# Altium PCB 辉光钟.PcbDoc
Units mm, origin at the board's own origin, x right, y up, seen from the top; angles counter-clockwise.
Board outline 141.86 x 70.74 mm, 2 copper layers (Top Layer, Bottom Layer); 55 components, 93 nets, 304 pads, 83 vias.
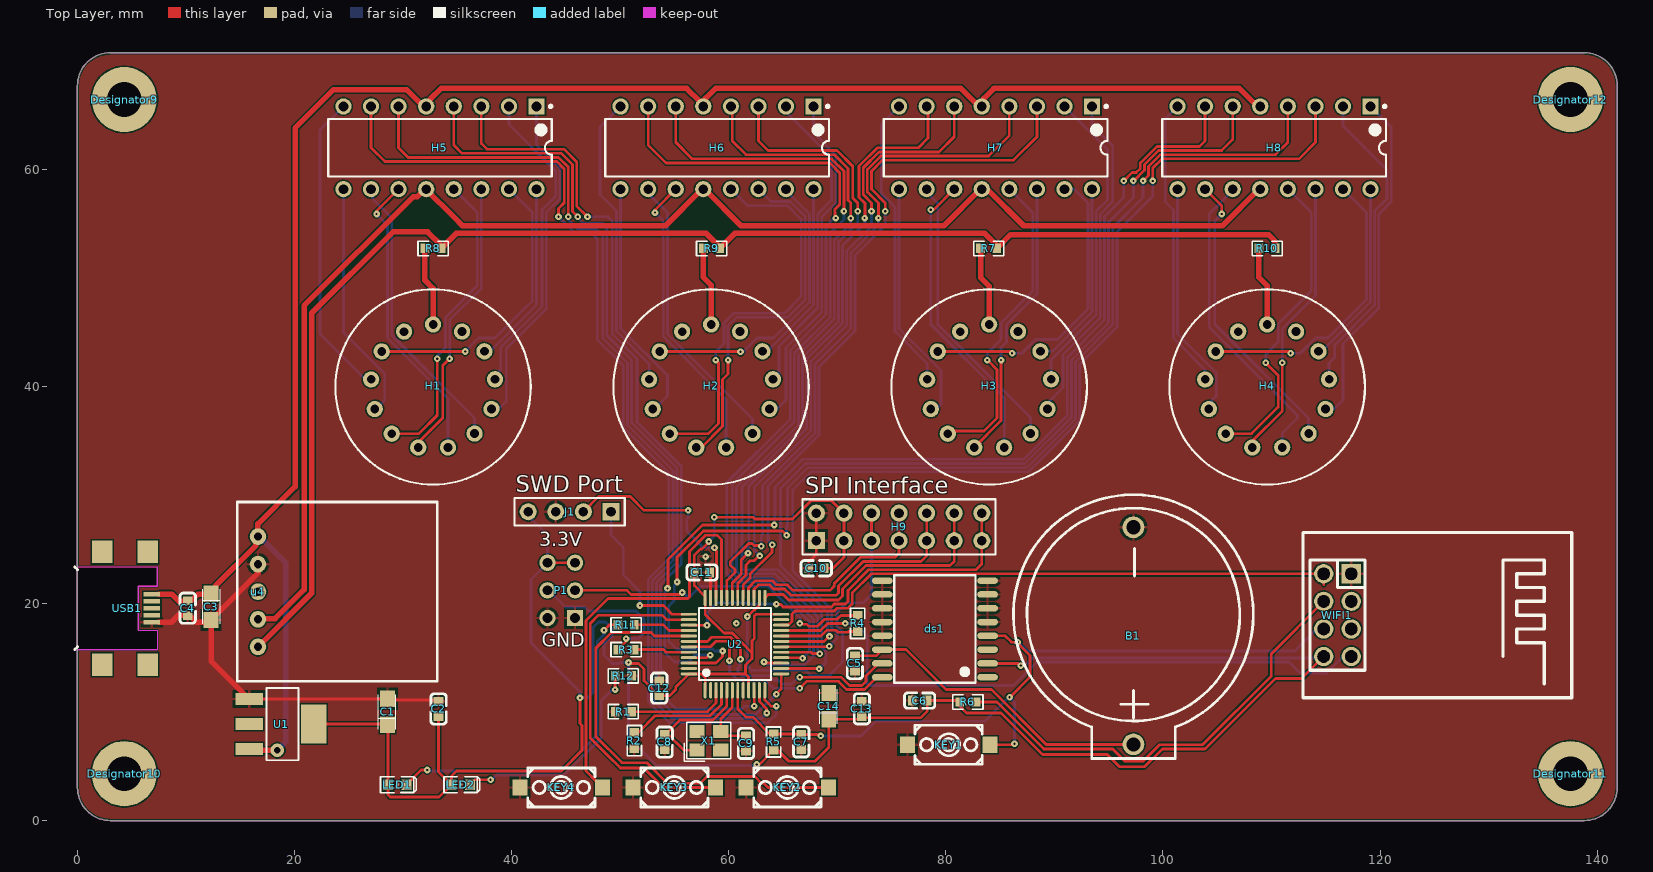
[diagram p0: Top Layer view]
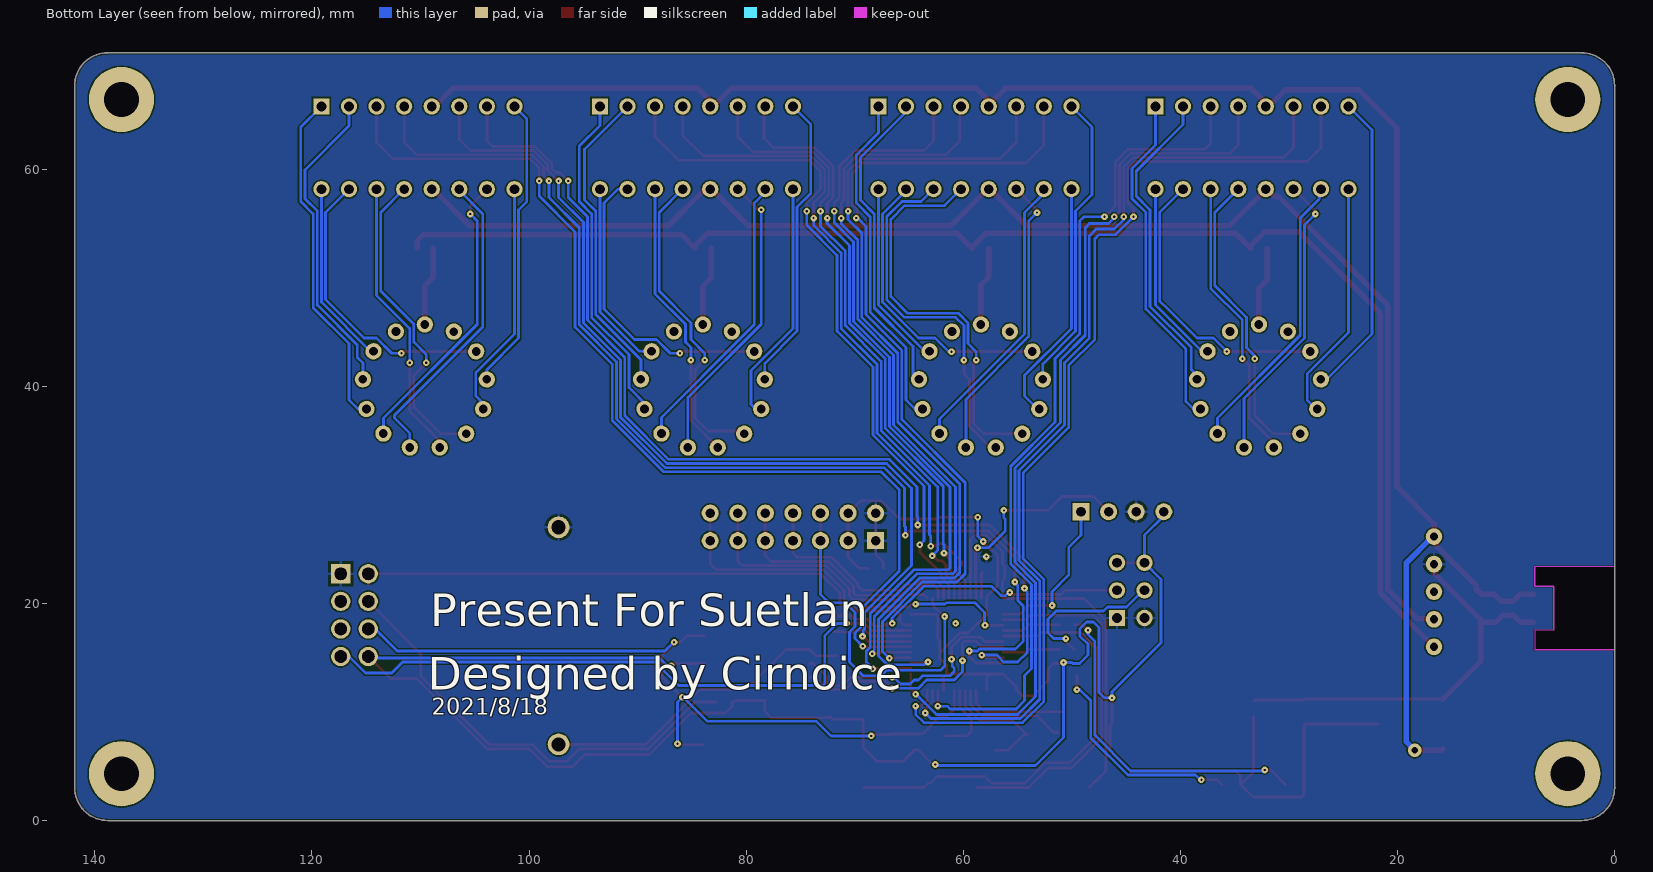
[diagram p1: Bottom Layer view, seen from below]

## Layer stack, top to bottom
Top Solder: solder mask 0.0102, Solder Resist, Dk 3.5
Top Layer: signal copper 0.0356
Dielectric 1: dielectric 0.32, FR-4, Dk 4.8
Bottom Layer: signal copper 0.0356
Bottom Solder: solder mask 0.0102, Solder Resist, Dk 3.5

## Board outline
3.049,0 cw(c3.048,3.048) 0,3.048 0,67.691 cw(c3.048,67.691) 3.048,70.74 3.048,70.739 138.811,70.739 cw(c138.811,67.691) 141.859,67.691 141.86,67.691 141.86,3.049 cw(c138.811,3.048) 138.812,0

## Design rules (kind name [scope] priority, off if disabled: settings)
Clearance [All] p1: gap=0.127 ignorepadtopadclearanceinfootprint=TRUE
PolygonConnect [All] p1: connectstyle=Relief reliefconductorwidth=0.254 reliefentries=4 polygonreliefangle="90 Angle" airgapwidth=0.254
RoutingVias [All] p1: holewidth=0.711 width=1.27 viastyle="Through Hole" minholewidth=0.711 minwidth=1.27 maxholewidth=0.711 maxwidth=1.27
SolderMaskExpansion [IsVia] p1: expansion=0.102 istentingtop=TRUE
Width [InNet('No Net')] p1: maxlimit=0.508 minlimit=0.508 preferedwidth=0.508 minimp=50.000000 maximp=50.000000 favimp=50.000000
30 further rules are at their usual default settings.

## Classes and differential pairs
component class 2: H1 H2 H3 H4 H5 H6 H7 H8 R7 R8 R9 R10
component class 1: B1 C1 C2 C3 C4 C5 C6 C7 C8 C9 C10 C11 C12 C13 C14 ds1 H9 J1 KEY1 KEY2 KEY3 KEY4 LED1 LED2 P1 R1 R2 R3 R4 R5 R6 R11 R12 U1 U2 u4 USB1 WIFI1 X1

## Components (designator, comment, footprint, x,y, rotation, side; value= is the part's Value field where it differs from the comment)
B1 "CR2032-BS-2-1" BAT-TH_BS-2-1 97.282,17.018 r0 top
C1 "1u" CASE-A_3216 28.575,10.033 r90 top
C2 "0603C" C0603 33.274,10.287 r90 top
C3 "1u" CASE-A_3216 12.319,19.685 r270 top
C4 "0603C" C0603 10.16,19.558 r270 top
C5 "0.1u" C0603 71.628,14.478 r90 top
C6 "0.1u" C0603 77.597,11.049 r0 top
C7 "0603C" C0603 66.675,7.239 r270 top
C8 "15pF" C0603 54.102,7.239 r90 top
C9 "15pF" C0603 61.595,7.112 r90 top
C10 "100nF" C0603 68.072,23.241 r0 top
C11 "100nF" C0603 57.531,22.86 r180 top
C12 "100nF" C0603 53.594,12.192 r270 top
C13 "100nF" C0603 72.263,10.287 r270 top
C14 "1u" CASE-A_3216 69.215,10.541 r90 top
Designator9 "Comment" M3-6W*6H-3.2D 4.318,66.421 r0 top
Designator10 "Comment" M3-6W*6H-3.2D 4.318,4.318 r0 top
Designator11 "Comment" M3-6W*6H-3.2D 137.541,4.318 r0 top
Designator12 "Comment" M3-6W*6H-3.2D 137.541,66.421 r0 top
ds1 "DS3231" DS3231 78.994,17.653 r180 top
H1 "IN-14" IN-14 32.766,40.032 r0 top
H2 "IN-14" IN-14 58.378,40.032 r0 top
H3 "IN-14" IN-14 83.99,40.032 r0 top
H4 "IN-14" IN-14 109.601,40.032 r0 top
H5 "K155ID1" DIP-16 33.401,61.976 r270 top
H6 "K155ID1" DIP-16 58.928,61.976 r270 top
H7 "K155ID1" DIP-16 84.582,61.976 r270 top
H8 "K155ID1" DIP-16 110.236,61.976 r270 top
H9 "HDR-F-2.54_2x7" HDR-F-2.54_2X7 75.692,27.051 r0 top
J1 "HDR-M-2.54_1x4" HDR-M-2.54_1X4 45.339,28.448 r180 top
KEY1 "K2-3.6×6.1_SMD" KEY-SMD_2P-L6.2-W3.6-LS8.0 80.264,6.985 r180 top
KEY2 "K2-3.6×6.1_SMD" KEY-SMD_2P-L6.2-W3.6-LS8.0 65.405,3.048 r180 top
KEY3 "K2-3.6×6.1_SMD" KEY-SMD_2P-L6.2-W3.6-LS8.0 54.991,3.048 r180 top
KEY4 "K2-3.6×6.1_SMD" KEY-SMD_2P-L6.2-W3.6-LS8.0 44.577,3.048 r180 top
LED1 "LED-0603_R" LED0603_RED 29.464,3.302 r0 top
LED2 "LED-0603_R" LED0603_RED 35.306,3.302 r0 top
P1 "ISCP" HDR2X3 45.847,18.669 r90 top
R1 "10KR" R0603 50.292,10.033 r0 top
R2 "10KR" R0603 51.308,7.366 r90 top
R3 "10KR" R0603 50.546,15.748 r180 top
R4 "10KR" R0603 71.882,18.161 r270 top
R5 "10K" R0603 64.135,7.239 r270 top
R6 "10KR" R0603 82.033,10.922 r180 top
R7 "10KR" R0603 83.947,52.705 r0 top
R8 "10KR" R0603 32.766,52.705 r0 top
R9 "10KR" R0603 58.42,52.705 r0 top
R10 "10KR" R0603 109.601,52.705 r0 top
R11 "0603R" R0603 50.546,18.034 r180 top
R12 "0603R" R0603 50.292,13.335 r180 top
U1 "AMS1117-3.3" SOT-223-3_L6.5-W3.4-P2.30-LS7.0-BR 18.796,8.89 r180 top
U2 "STM32F103C8T6" LQFP-48_L7.0-W7.0-P0.50-LS9.0-BL 60.579,16.256 r0 top locked
u4 "5-170" 5-170V 16.637,21.082 r270 top
USB1 "USB-Micro_2" MICRO-USB-SMD_5P_C40957 4.572,19.558 r270 top
WIFI1 "ESP-01" ESP-01 117.348,22.733 r270 top
X1 "20MHz" CRYSTAL-SMD_4P-L3.2-W2.5-BL 58.166,7.366 r0 top

## Footprints (in the part's own frame and the unit in brackets; to place one, negate y for a bottom-side part, rotate by r counter-clockwise, add the part's x,y. Pads: shape width x height; smd on the part's side, far side on the other; paste and mask are expansions set on the pad)
5-170V [mil]
  round 60 hole 30: 0(0,0) 1(-200,0) 2(-100,0) 3(100,0) 4(200,0)
  silkscreen extent -325,-75 325,650, body extent -325,-75 325,650, height 49
BAT-TH_BS-2-1 [mm]
  round 2 hole 1.3: 1(0,-10) 2(0,10)
  silkscreen extent -11.05,-11.3 11.04,13
C0603 [mm]
  rect 0.8x0.9 smd: 1(-0.7,0) 2(0.7,0)
  silkscreen extent -1.41,-0.71 1.39,0.72
CASE-A_3216 [mm]
  rect 1.5x1.359 smd: 1(-1.2,0) 2(1.2,0)
  silkscreen extent -1.64,-0.76 1.56,0.84
CRYSTAL-SMD_4P-L3.2-W2.5-BL [mm]
  rect 1.4x1.2 smd: 1(-1.1,-0.85) 2(1.1,-0.85) 3(1.1,0.85) 4(-1.1,0.85)
  silkscreen extent -2.26,-1.91 2.03,1.68
DIP-16 [mm] "DIP; 16 Leads; Row Spacing 7.62 mm; Pitch 2.54 mm"
  rect 1.5x1.5 hole 0.9: 1(-3.81,8.89)
  round 1.5 hole 0.9: 2(-3.81,6.35) 3(-3.81,3.81) 4(-3.81,1.27) 5(-3.81,-1.27) 6(-3.81,-3.81) 7(-3.81,-6.35) 8(-3.81,-8.89) 9(3.81,-8.89) 10(3.81,-6.35) 11(3.81,-3.81) 12(3.81,-1.27) 13(3.81,1.27) 14(3.81,3.81) 15(3.81,6.35) 16(3.81,8.89)
  silkscreen extent -3.93,-10.3 2.65,10.32, body extent -3.6,-10.28 3.6,10.28, height 5.08
DS3231 [mm]
  oval 1.9x0.6 smd: 1(-4.85,4.445) 2(-4.85,3.175) 3(-4.85,1.905) 4(-4.85,0.635) 5(-4.85,-0.635) 6(-4.85,-1.905) 7(-4.85,-3.175) 8(-4.85,-4.445) 9(4.85,-4.445) 10(4.85,-3.175) 11(4.85,-1.905) 12(4.85,-0.635) 13(4.85,0.635) 14(4.85,1.905) 15(4.85,3.175) 16(4.85,4.445)
  silkscreen extent -3.75,-4.95 3.75,4.95, body extent -5.15,-5.1 5.15,5.1, height 3.5
ESP-01 [mil]
  rect 70x70 hole 45 slot 45.2 at 0 deg: 1(0,0)
  round 70 hole 45 slot 45.2 at 0 deg: 2(100,0) 3(200,0) 4(300,0) 5(300,-100) 6(200,-100) 7(100,-100) 8(0,-100)
  silkscreen extent -150,-175 450,800
HDR2X3 [mm] "Connector; Header; 3x2 Position"
  rect 1.5x1.5 hole 0.9: 1(0,0)
  round 1.5 hole 0.9: 2(0,2.54) 3(2.54,0) 4(2.54,2.54) 5(5.08,0) 6(5.08,2.54)
HDR-F-2.54_2X7 [mil]
  rect 62x62 hole 35: 1(-300,-50)
  round 62 hole 35: 2(-300,50) 3(-200,-50) 4(-200,50) 5(-100,-50) 6(-100,50) 7(0,-50) 8(0,50) 9(100,-50) 10(100,50) 11(200,-50) 12(200,50) 13(300,-50) 14(300,50)
  silkscreen extent -350,-100 350,100
HDR-M-2.54_1X4 [mil]
  rect 62x62 hole 35: 1(-150,0)
  round 62 hole 35: 2(-50,0) 3(50,0) 4(150,0)
  silkscreen extent -200,-50 200,50
IN-14 [mm]
  round 1.5 hole 0.8: 0(4.728,3.19) 1(-4.732,3.182) 2(-5.708,0.608) 3(-5.375,-2.125) 4(-3.809,-4.389) 5(-1.371,-5.667) 6(1.382,-5.665) 7(3.818,-4.383) 8(5.379,-2.115) 9(5.708,0.618) 11(0.001,5.667) L0(2.665,5.013) R0(-2.672,5.008)
  silkscreen extent -9,-9.08 9,8.92
KEY-SMD_2P-L6.2-W3.6-LS8.0 [mm]
  rect 1.4x1.5 smd: 1(-3.8,0) 2(3.8,0)
  silkscreen extent -3.1,-1.8 3.1,1.8
LED0603_RED [mm]
  rect 0.9x1 smd: 1(-0.85,0) 2(0.85,0)
  silkscreen extent -1.54,-0.73 1.75,0.73
LQFP-48_L7.0-W7.0-P0.50-LS9.0-BL [mm]
  oval 0.27x1.5 smd: 1(-2.75,-4.25) 2(-2.25,-4.25) 3(-1.75,-4.25) 4(-1.25,-4.25) 5(-0.75,-4.25) 6(-0.25,-4.25) 7(0.25,-4.25) 8(0.75,-4.25) 9(1.25,-4.25) 10(1.75,-4.25) 11(2.25,-4.25) 12(2.75,-4.25) 25(2.75,4.25) 26(2.25,4.25) 27(1.75,4.25) 28(1.25,4.25) 29(0.75,4.25) 30(0.25,4.25) 31(-0.25,4.25) 32(-0.75,4.25) 33(-1.25,4.25) 34(-1.75,4.25) 35(-2.25,4.25) 36(-2.75,4.25)
  oval 1.5x0.27 smd: 13(4.25,-2.75) 14(4.25,-2.25) 15(4.25,-1.75) 16(4.25,-1.25) 17(4.25,-0.75) 18(4.25,-0.25) 19(4.25,0.25) 20(4.25,0.75) 21(4.25,1.25) 22(4.25,1.75) 23(4.25,2.25) 24(4.25,2.75) 37(-4.25,2.75) 38(-4.25,2.25) 39(-4.25,1.75) 40(-4.25,1.25) 41(-4.25,0.75) 42(-4.25,0.25) 43(-4.25,-0.25) 44(-4.25,-0.75) 45(-4.25,-1.25) 46(-4.25,-1.75) 47(-4.25,-2.25) 48(-4.25,-2.75)
  silkscreen extent -3.33,-3.31 3.3,3.34
M3-6W*6H-3.2D [mm]
  round 6 hole 3.2: 1(0,0)
MICRO-USB-SMD_5P_C40957 [mm]
  rect 0.4x1.524 smd: 1(-1.3,2.288) 2(-0.65,2.288) 3(0,2.288) 4(0.65,2.288) 5(1.3,2.288)
  rect 2.1x1.9 smd: 6(5.2,1.913) 7(5.2,-2.288) 8(-5.2,-2.288) 9(-5.2,1.913)
  Keep-Out Layer board cut-out: -3.81,-4.572 -3.81,2.794 -2.032,2.794 -2.032,1.016 2.032,1.016 2.032,2.794 3.81,2.794 3.81,-4.572 -3.81,-4.572
  Keep-Out Layer lines w0.1: 3.81,-4.57 3.81,2.796 2.032,2.794 2.032,1.016 -2.032,1.016 -2.032,2.794 -3.81,2.796 -3.81,-4.57 3.81,-4.57
  silkscreen extent -3.81,-4.82 3.81,-4.57
R0603 [mm]
  rect 0.806x0.864 smd: 1(-0.753,0) 2(0.753,0)
  silkscreen extent -1.39,-0.66 1.39,0.66
SOT-223-3_L6.5-W3.4-P2.30-LS7.0-BR [mm]
  rect 2.5x1.1 smd: 1(2.97,-2.3) 2(2.97,0) 3(2.97,2.3)
  rect 2.34x3.6 smd: 4(-2.97,0)
  silkscreen extent -1.57,-3.33 1.37,3.33

## Part data
B1: BOM_JLCPCB Part Class="Extended Part", BOM_Manufacturer=Q&J, BOM_Manufacturer Part=BS-2-1, BOM_Supplier=LCSC, BOM_Supplier Part=C70376, spicePre=B, spiceSymbolName=CR2032-BS-2-1
C5 C6 C8 C9 C10 C11 C12 C13: library part 0603C, Contributor=LCEDA_Lib, nameAlias=Value(F), spicePre=C, spiceSymbolName=C_0603_US
KEY1 KEY2 KEY3 KEY4: BOM_Manufacturer Part=K2-1107ST-A4SW-06, BOM_Supplier=LCSC, BOM_Supplier Part=C118141, Contributor=LCEDA_Lib, spicePre=K, spiceSymbolName=K2-3.6×6.1_SMD, 制造商=韩国韩荣
LED1 LED2: BOM_Manufacturer=EVERLIGHT(台湾亿光), BOM_Manufacturer Part=19-217/R6C-AL1M2VY/3T, BOM_Supplier=LCSC, BOM_Supplier Part=C72044, Contributor=LCEDA_01, spicePre=L, spiceSymbolName=LED-0603_R
P1: library part "Header 3X2", "Header, 3-Pin, Dual row", LatestRevisionDate=17-Jul-2002, LatestRevisionNote="Re-released for DXP Platform.", Publisher="Altium Limited"
R1 R2 R3 R4 R5 R6 R7 R8 R9 R10: library part 0603R, Contributor=LCEDA_Lib, nameAlias=Value(Ω), spicePre=R, spiceSymbolName=R_0603_EU
U1: BOM_JLCPCB Part Class="Basic Part", BOM_Manufacturer=AMS, BOM_Manufacturer Part=AMS1117-3.3, BOM_Supplier=LCSC, BOM_Supplier Part=C6186, sourceId=dwIGgezVh, spicePre=U, spiceSymbolName=AMS1117-3.3, timeStamp=1476261164
U2: BOM_JLCPCB Part Class="Basic Part", BOM_Manufacturer=STMicroelectronics, BOM_Manufacturer Part=STM32F103C8T6, BOM_Supplier=LCSC, BOM_Supplier Part=C8734, spicePre=U, spiceSymbolName=STM32F103C8T6, timeStamp=1455028086
USB1: BOM_Manufacturer=ValuePro, BOM_Supplier=LCSC, BOM_Supplier Part=C40957, Contributor=LCEDA_Lib, spicePre=U, spiceSymbolName=USB-Micro_2
X1: BOM_JLCPCB Part Class="Extended Part", BOM_Manufacturer="Zhejiang Abel Elec", BOM_Manufacturer Part=SMD-3225_4P20MHZ20PF10PPM, BOM_Supplier=LCSC, BOM_Supplier Part=C172730, Contributor=LCSC, nameAlias=Frequency, spicePre=X, spiceSymbolName=SMD-3225_4P20MHZ20PF10PPM
C1 C3 C14: Contributor=LCEDA_Lib, nameAlias=Value(F), spicePre=C, spiceSymbolName=C_Tan_SMD_A_US
C2 C4 C7: Contributor=LCEDA_Lib, nameAlias=Value(F), spicePre=C, spiceSymbolName=C_0603_US
H9: BOM_Supplier=LCSC, BOM_Supplier Part=C38844, Contributor=LCEDA_Lib, spicePre=H, spiceSymbolName=HDR-F-2.54_2x7
J1: BOM_Supplier=LCSC, BOM_Supplier Part=C124378, Contributor=LCEDA_Lib, spicePre=J, spiceSymbolName=HDR-M-2.54_1x4
R11 R12: Contributor=LCEDA_Lib, nameAlias=Value(Ω), spicePre=R, spiceSymbolName=R_0603_EU
WIFI1: Contributor=jishuhai, spicePre=w, spiceSymbolName=ESP-01

## Via types
v1: diameter 0.61, hole 0.203, Top Layer to Bottom Layer, tented both sides, 82 vias
v2: diameter 1.27, hole 0.635, Top Layer to Bottom Layer, tented both sides, 1 vias

## Nets (pads, with @x,y where several pads share a name; then routed paths per layer and width w, separated by ;. In a path a pad name is that pad's centre, name@x,y a point inside that pad or via, vN(x,y) a via of type N, cw(c..) or ccw(c..) an arc to the next point about the centre after c; other vN are vias at no path point)
1-7: H1.7 H5.10 | length 27
  Bottom Layer w0.254: H5.10@26.67,57.785 H5.10 27.216,58.002 27.216,57.24 28.956,55.499 28.956,44.704 36.585,37.076 H1.7
1-8: H1.8 H5.1 | length 31.8
  Bottom Layer w0.254: H1.8 38.806,37.917 39.497,38.608 39.497,43.434 43.18,47.117 43.18,56.007 44.45,57.277 44.45,60.071 42.291,62.23 H5.1
1-9: H1.9 H5.2 | length 29.2
  Bottom Layer w0.254: H1.9 38.474,41.014 38.989,41.529 38.989,43.561 42.799,47.371 42.799,56.261 44.069,57.531 44.069,59.817 39.751,64.135 H5.2
3.3V: C1.1 C2.1 C6.2 C10.2 C11.2 C12.2 C13.2 C14.1 ds1.2 H9.3 H9.4 J1.4 LED1.1 LED2.1 P1.5 P1.6 R5.2 R6.2 U1.4 U2.1 U2.9 U2.24 U2.36 U2.48 WIFI1.5 | length 261.2
  Top Layer w0.254: U1.4 28.518,8.89 28.614,8.794 LED1.1 28.614,2.374 28.829,2.159 33.313,2.159 LED2.1 ; C2.1 33.274,4.484 LED2.1 ; P1.6 P1.5 44.323,23.749 ; v1(46.304,11.303) 46.304,8.931 46.482,8.753 46.482,6.477 44.577,4.572 34.925,4.572 34.456,4.103 LED2.1 ; v1@50.8,14.478 51.689,14.478 52.197,13.97 52.197,12.889 C12.2 54.545,11.492 55.118,12.065 55.118,12.295 U2.48 57.252,13.506 57.487,13.506 ; U2.1 57.829,13.164 57.487,13.506 ; v1(58.166,25.705) 58.166,25.654 57.528,25.016 57.401,25.016 56.831,24.446 C11.2 56.831,21.655 57.829,20.657 U2.36 57.829,19.006 59.563,17.272 60.325,17.272 61.341,16.256 62.154,15.443 ; v1(58.674,27.94) 62.253,27.94 62.405,27.788 65.888,27.788 67.564,29.464 69.469,29.464 H9.4 H9.3 70.612,24.257 69.596,23.241 C10.2 ; U2.9 61.829,13.228 61.551,13.506 ; v1@62.611,5.08 62.729,5.08 R5.2 ; R5.2@64.142,6.524 64.469,6.524 65.532,5.461 67.945,5.461 69.215,6.731 C14.1 72.017,9.341 C13.2 ; U2.24 64.826,19.003 62.506,19.003 62.357,18.854 62.357,16.764 62.154,16.561 62.154,15.443 ; C13.2@72.14,9.464 77.663,9.464 78.297,10.098 C6.2 81.019,11.049 R6.2@81.318,10.75 ; R6.2 81.28,10.541 81.915,9.906 85.09,9.906 88.9,6.096 94.869,6.096 96.012,4.953 98.298,4.953 99.949,6.604 103.886,6.604 110.363,13.081 112.776,13.081 WIFI1.5 ; ds1.2 86.693,14.478 v1(86.894,14.277) ; 57.487,13.506 61.551,13.506 ; 61.551,13.506 61.551,14.315 62.154,14.917 62.154,15.443
  Bottom Layer w0.254: J1.4 41.529,28.067 43.307,26.289 P1.6 41.783,22.225 41.783,16.383 46.304,11.862 v1(46.304,11.303) 46.99,11.303 47.498,11.811 47.498,17.399 47.498,17.78 48.006,18.288 48.641,18.288 49.276,17.653 49.276,17.018 48.514,16.256 48.514,15.24 49.276,14.478 49.929,14.478 50.013,14.562 50.679,14.562 v1@50.763,14.478 ; v1(50.763,14.562) 50.763,7.658 53.34,5.08 v1@62.611,5.08 ; v1(58.166,25.705) 58.674,26.213 v1(58.674,27.94) ; v1(86.894,14.277) 87.302,14.277 88.011,14.986 114.681,14.986 WIFI1.5
  other v1: 62.574,5.164
+5V: C3.1 C4.1 H5.5 H6.5 H7.5 H8.5 U1.3 u4.1 USB1.1 | length 171.2
  Top Layer w0.508: USB1.1@7.495,20.858 8.694,20.858 9.359,20.193 10.428,20.193 11.093,20.858 C3.1@12.292,20.858 ; C3.1 12.745,21.311 12.745,21.635 16.443,25.333 16.443,25.968 u4.1 ; U1.3 15.939,6.477 v2(18.415,6.477) ; u4.1@16.617,26.183 16.617,27.322 20.066,30.771 20.066,63.791 23.604,67.329 30.335,67.329 31.877,65.786 H5.5 32.131,66.055 32.547,66.47 32.547,66.493 33.51,67.456 56.116,67.456 57.398,66.174 57.398,66.071 H6.5@57.386,66.059 ; H6.5 H6.5@57.386,66.059 ; H7.5@82.913,65.932 81.389,67.456 58.783,67.456 57.848,66.521 57.848,66.244 57.662,66.059 H6.5@57.386,66.059 ; H7.5 83.04,66.059 83.316,66.059 83.502,66.244 83.502,66.521 84.437,67.456 107.043,67.456 108.712,65.786 H8.5
  Bottom Layer w0.508: u4.1@16.54,26.065 16.861,26.065 19.177,23.749 19.177,7.332 19.177,7.239 v2(18.415,6.477)
+170V: R7.2 R8.2 R9.2 R10.2 u4.4 | length 129.4
  Top Layer w0.508: u4.4 21.59,20.955 21.59,46.736 29.083,54.229 32.258,54.229 33.519,52.968 R8.2 34.916,54.102 57.912,54.102 59.173,52.841 R9.2 60.57,54.102 83.566,54.102 84.7,52.968 R7.2 85.97,53.975 109.728,53.975 110.316,53.387 R10.2@110.316,52.712
BOOT0: P1.4 R3.2 | length 14.4
  Top Layer w0.254: R3.2 50.546,16.501 v1(50.546,16.764)
  Bottom Layer w0.254: P1.4 43.434,21.209 44.97,19.673 46.702,19.673 47.071,19.304 51.435,19.304 52.197,18.542 52.197,17.294 51.667,16.764 v1(50.546,16.764)
BOOT1: P1.3 R4.1 | length 28.9
  Top Layer w0.254: P1.3 50.623,21.209 51.004,20.828 55.442,20.828 55.62,21.006 v1(55.716,21.006) ; v1(66.548,18.161) 66.616,18.093 67.175,18.093 67.361,17.907 68.199,17.907 68.834,18.542 69.977,18.542 70.331,18.896 R4.1@71.724,18.896
  Bottom Layer w0.254: v1(55.716,21.006) 55.812,21.006 56.103,20.715 56.529,20.715 57.4,21.586 63.631,21.586 66.571,18.646 66.571,18.138 v1@66.582,18.127
CS1-1: H5.3 U2.10 | length 78.6
  Top Layer w0.254: H5.3 37.211,62.357 37.719,61.849 44.831,61.849 45.99,60.691 45.99,56.627 v1(46.99,55.626) ; v1(62.357,10.541) U2.10@62.357,11.979
  Bottom Layer w0.254: v1(46.99,55.626) 48.895,55.626 49.276,55.245 49.276,44.831 51.562,42.545 51.562,36.703 55.626,32.639 55.626,23.653 53.721,21.748 53.721,14.002 54.356,13.367 54.356,11.049 55.118,10.287 61.214,10.287 61.468,10.541 v1(62.357,10.541)
CS1-2: H5.6 U2.11 | length 88.8
  Top Layer w0.254: H5.6 29.591,61.976 30.48,61.087 44.323,61.087 45.228,60.183 v1@45.228,55.642 ; U2.11 62.829,10.958 63.5,10.287 v1(63.5,9.906)
  Bottom Layer w0.254: v1(45.212,55.626) 45.212,55.372 46.101,54.483 47.752,54.483 48.387,53.848 48.387,44.45 50.673,42.164 50.673,36.449 54.864,32.258 54.864,23.968 52.959,22.063 52.959,11.176 54.737,9.398 62.865,9.398 62.992,9.398 v1(63.5,9.906)
CS1-3: H5.7 U2.12 | length 93.5
  Top Layer w0.254: H5.7 27.051,61.976 28.321,60.706 44.165,60.706 44.847,60.025 44.847,56.912 44.323,56.388 v1(44.323,55.626) ; U2.12 63.329,11.093 63.881,10.541 v1(64.389,10.541)
  Bottom Layer w0.254: v1(44.323,55.626) 45.974,53.975 47.498,53.975 47.879,53.594 47.879,44.323 50.292,41.91 50.292,36.195 54.483,32.004 54.483,24.126 52.578,22.221 52.578,10.969 54.53,9.017 63.373,9.017 63.627,9.017 64.389,9.779 v1(64.389,10.541)
CS1-4: H5.4 U2.13 | length 84.6
  Top Layer w0.254: H5.4 34.671,62.23 35.433,61.468 44.577,61.468 45.609,60.437 45.609,56.119 v1(46.101,55.626) ; v1(64.389,11.633) 64.389,11.684 64.829,12.124 U2.13
  Bottom Layer w0.254: v1(46.101,55.626) 46.101,55.499 46.609,54.991 48.387,54.991 48.768,54.61 48.768,44.704 51.054,42.418 51.054,36.672 55.245,32.481 55.245,23.81 53.34,21.905 53.34,11.43 54.991,9.779 62.484,9.779 64.338,11.633 v1(64.389,11.633)
CS2-1: H6.3 U2.14 | length 72.6
  Top Layer w0.254: H6.3 62.738,62.611 63.627,61.722 69.977,61.722 71.425,60.274 71.425,57.353 71.882,56.896 v1(71.882,56.134) ; U2.14 66.457,14.006 68.29,14.006 v1(68.326,13.97)
  Bottom Layer w0.254: v1(68.326,13.97) 68.936,14.58 68.936,15.599 68.58,15.954 68.58,19.05 64.516,23.114 61.363,23.114 61.214,23.263 61.214,30.703 66.802,36.291 66.802,42.672 70.104,45.974 70.104,53.309 71.882,55.087 v1(71.882,56.134)
CS2-2: H6.6 U2.15 | length 80.4
  Top Layer w0.254: H6.6 55.118,62.484 56.642,60.96 69.469,60.96 70.612,59.817 v1(70.612,56.134) ; v1(63.246,14.605) 63.373,14.605 63.472,14.506 U2.15
  Bottom Layer w0.254: v1(63.246,14.605) 63.319,14.605 63.573,14.351 66.996,14.351 67.818,15.173 67.818,18.542 64.008,22.352 60.802,22.352 60.325,22.829 60.325,30.988 66.04,36.703 66.04,43.053 69.342,46.355 69.342,54.102 70.612,55.372 v1(70.612,56.134)
CS2-3: H6.7 U2.16 | length 78.7
  Top Layer w0.254: H6.7 52.578,62.23 54.229,60.579 69.311,60.579 70.231,59.659 70.231,56.769 69.774,56.312 69.774,56.058 69.782,56.05 69.782,55.567 v1(69.85,55.499) ; U2.16 64.832,15.003 66.746,15.003 v1(66.802,14.947)
  Bottom Layer w0.254: v1(66.802,14.947) 67.437,15.582 67.437,16.576 67.437,18.319 63.785,21.971 60.579,21.971 59.817,22.733 59.817,31.115 65.659,36.957 65.659,43.307 68.961,46.609 68.961,54.737 69.723,55.499 v1(69.85,55.499)
CS2-4: H6.4 U2.17 | length 72.5
  Top Layer w0.254: H6.4@60.325,65.532 60.325,62.611 61.595,61.341 69.723,61.341 70.993,60.071 70.993,57.15 71.247,56.896 v1(71.247,55.48) ; U2.17 67.564,15.506 67.691,15.379 68.365,15.379 v1(68.377,15.367)
  Bottom Layer w0.254: v1(68.377,15.367) 68.377,15.463 68.199,15.641 68.199,18.796 64.262,22.733 60.96,22.733 60.706,22.987 60.706,30.734 66.421,36.449 66.421,42.895 69.723,46.197 69.723,53.467 71.247,54.991 v1(71.247,55.48)
CS3-1: H7.3 U2.29 | length 64.9
  Top Layer w0.254: U2.29 61.329,21.637 61.329,21.705 61.976,22.352 61.976,22.705 63.986,24.714 63.986,25.378 v1(64.008,25.4) ; v1(74.422,56.134) 74.422,56.896 73.152,58.166 73.152,59.817 74.168,60.833 86.233,60.833 88.392,62.992 H7.3
  Bottom Layer w0.254: v1(64.008,25.4) 63.627,25.781 63.627,30.83 68.326,35.529 68.326,41.783 71.628,45.085 71.628,52.07 74.422,54.864 v1(74.422,56.134)
CS3-2: H7.6 U2.30 | length 58.1
  Top Layer w0.254: U2.30 60.829,21.586 60.829,21.84 61.595,22.606 61.595,23.552 61.977,23.934 62.345,23.934 62.795,24.384 v1(62.865,24.384) ; v1(73.152,56.134) 73.152,56.896 72.39,57.658 72.39,60.133 73.853,61.595 79.375,61.595 80.772,62.992 H7.6
  Bottom Layer w0.254: v1(62.865,24.384) 62.357,24.892 62.357,30.734 67.564,35.941 67.564,42.291 70.866,45.593 70.866,52.451 73.152,54.737 v1(73.152,56.134)
CS3-3: H7.7 U2.31 | length 55.3
  Top Layer w0.254: U2.31 60.329,21.879 61.154,22.704 61.154,24.019 v1(61.773,24.638) ; v1(72.517,55.499) 72.549,55.531 72.549,56.198 72.549,56.865 72.009,57.404 72.009,60.291 73.695,61.976 77.47,61.976 78.359,62.865 H7.7@78.359,65.659
  Bottom Layer w0.254: v1(61.773,24.638) 61.773,25.397 61.849,25.474 61.849,30.8 67.183,36.134 67.183,42.514 70.485,45.816 70.485,52.959 72.549,55.023 v1@72.549,55.531
CS3-4: H7.4 U2.32 | length 64.1
  Top Layer w0.254: U2.32 59.829,22.11 60.579,22.86 60.579,23.114 60.135,23.559 60.135,23.813 61.849,25.527 62.134,25.527 62.32,25.341 62.924,25.341 v1(62.992,25.273) ; v1(73.787,55.499) 73.787,56.896 72.771,57.912 72.771,58.466 72.771,59.975 74.01,61.214 83.947,61.214 85.852,63.119 H7.4
  Bottom Layer w0.254: v1(62.992,25.273) 62.992,26.213 63.119,26.34 63.119,30.861 67.945,35.687 67.945,42.037 71.247,45.339 71.247,52.293 73.767,54.813 73.767,55.479 v1(73.787,55.499)
CS4-1: H8.3 U2.18 | length 95.3
  Top Layer w0.254: U2.18 64.833,16.002 69.215,16.002 v1(69.269,16.056) ; v1(99.06,58.928) 99.06,60.106 99.915,60.96 112.522,60.96 114.046,62.484 H8.3
  Bottom Layer w0.254: v1(69.269,16.056) 69.977,16.764 69.977,17.272 69.469,17.78 69.469,17.907 69.469,19.431 65.888,23.013 65.888,30.441 67.578,32.131 87.63,32.131 92.329,36.83 92.329,42.024 95.758,45.453 95.758,54.216 99.06,57.518 v1(99.06,58.928)
CS4-2: H8.6 U2.19 | length 87.9
  Top Layer w0.254: U2.19@64.838,16.506 68.777,16.506 69.238,16.967 v1(69.286,16.967) ; v1(97.282,58.928) 97.313,58.928 98.298,59.913 98.298,60.421 99.599,61.722 105.41,61.722 106.426,62.738 H8.6
  Bottom Layer w0.254: v1(69.286,16.967) 69.218,17.035 69.218,17.493 69.088,17.622 69.088,19.177 64.77,23.495 64.77,30.607 67.056,32.893 87.306,32.893 91.567,37.154 91.567,42.418 94.996,45.847 94.996,55.118 97.282,57.404 v1(97.282,58.928)
CS4-3: H8.7 U2.45 | length 96.1
  Top Layer w0.254: v1(54.356,21.387) 54.407,21.438 54.407,24.054 57.582,27.229 v1(64.186,27.229) ; U2.45@56.332,15.006 57.963,15.006 58.197,15.24 v1(58.293,15.24) ; v1(96.393,58.928) 97.155,59.69 97.536,59.69 97.917,60.071 97.917,60.579 99.441,62.103 103.378,62.103 103.886,62.611 H8.7
  Bottom Layer w0.254: v1(54.356,21.387) 54.356,21.314 54.102,21.06 54.102,15.494 54.991,14.605 56.277,14.605 56.912,15.24 v1(58.293,15.24) ; v1(64.186,27.229) 64.186,27.966 64.262,28.042 64.262,30.734 66.802,33.274 87.148,33.274 91.186,37.312 91.186,42.672 94.615,46.101 94.615,55.626 96.393,57.404 v1(96.393,58.928)
CS4-4: H8.4 U2.46 | length 105.1
  Top Layer w0.254: v1(55.245,21.971) 55.245,24.257 57.658,26.67 64.948,26.67 v1(65.329,26.289) ; U2.46 58.829,14.506 59.436,15.113 v1(59.436,15.621) ; v1(98.171,58.928) 98.679,59.436 98.679,60.264 99.757,61.341 110.363,61.341 111.506,62.484 H8.4
  Bottom Layer w0.254: v1(55.245,21.971) 55.245,21.899 54.991,21.645 54.991,20.298 54.483,19.79 54.483,16.51 55.194,15.799 58.525,15.799 58.703,15.621 v1(59.436,15.621) ; v1(65.329,26.289) 65.329,27.026 65.405,27.102 65.405,30.625 67.293,32.512 87.464,32.512 91.948,36.996 91.948,42.26 95.377,45.689 95.377,54.61 98.171,57.404 v1(98.171,58.928)
GND: B1.2 C1.2 C2.2 C3.2 C4.2 C5.1 C6.1 C7.2 C8.1 C9.1 C10.1 C11.1 C12.1 C13.1 C14.2 ds1.5 ds1.6 ds1.7 ds1.8 ds1.9 ds1.10 ds1.11 ds1.12 ds1.13 H9.1 H9.2 J1.3 KEY1.2 KEY2.2 KEY3.2 KEY4.2 P1.1 P1.2 R1.1 R2.1 R12.1 U1.1 U2.8 U2.23 U2.35 U2.47 u4.2 USB1.5 WIFI1.1 | length 46.4
  Top Layer w0.254: U1.1 28.579,11.19 28.655,11.114 33.147,11.114 C2.2 ; C11.1 58.329,22.762 U2.35 ; C10.1 67.372,23.811 68.072,24.511 H9.1 H9.2
  Top Layer w0.508: USB1.5@7.495,18.258 8.647,18.258 9.312,18.923 10.286,18.923 10.951,18.258 12.104,18.258 12.325,18.48 16.637,22.792 u4.2 ; C3.2 12.319,18.258 12.319,14.697 U1.1
  other v1: 57.872,24.318
GNDH: H5.12 H6.12 H7.12 H8.12 u4.3 | length 132.4
  Top Layer w0.508: u4.3 16.694,18.599 18.218,18.599 20.885,21.266 20.885,47.428 30.918,57.461 31.299,57.461 32.004,58.166 H5.12 ; H5.12@32.131,58.153 34.728,55.556 35.49,54.794 54.159,54.794 57.531,58.166 H6.12 57.772,58.166 61.144,54.794 79.813,54.794 83.185,58.166 H7.12 83.502,57.976 83.997,57.976 87.179,54.794 105.467,54.794 108.839,58.166 H8.12
IIC1_SCL: ds1.16 U2.43 | length 22.4
  Top Layer w0.254: U2.43 58.297,16.006 58.801,16.51 59.922,16.51 60.071,16.361 v1(60.071,14.732) ; v1(66.548,12.192) 67.183,12.827 67.31,12.827 70.104,12.827 70.866,12.065 72.517,12.065 73.66,13.208 ds1.16
  Bottom Layer w0.254: v1(60.071,14.732) 60.071,13.716 60.833,12.954 63.373,12.954 64.135,12.192 v1(66.548,12.192)
IIC1_SDA: ds1.15 U2.42 | length 23.2
  Top Layer w0.254: U2.42 58.035,16.506 58.42,16.891 60.167,16.891 61.087,15.971 v1(61.087,14.859) ; v1(66.548,13.208) 67.31,13.208 70.358,13.208 71.12,12.446 72.263,12.446 72.644,12.827 72.644,13.335 73.787,14.478 ds1.15
  Bottom Layer w0.254: v1(61.087,14.859) 61.019,14.791 61.019,14.232 60.833,14.046 60.833,13.716 61.214,13.335 63.754,13.335 64.135,12.954 64.516,12.954 64.897,12.573 65.786,12.573 66.421,13.208 v1(66.548,13.208)
KEY1: KEY2.1 U2.41 | length 41.4
  Top Layer w0.254: U2.41 53.169,17.006 52.853,17.323 49.2,17.323 47.752,15.875 47.752,7.747 50.165,5.334 52.451,5.334 54.356,3.429 57.363,3.429 57.986,4.052 62.41,4.052 63.033,3.429 63.246,3.429 63.627,3.048 KEY2.1
KEY2: KEY3.1 U2.38 | length 33.6
  Top Layer w0.254: U2.38 54.265,18.506 53.848,18.923 48.006,18.923 47.244,18.161 47.244,7.62 48.768,6.096 50.016,4.848 52.175,4.848 53.975,3.048 KEY3.1
KEY3: KEY4.1 U2.33 | length 39.9
  Top Layer w0.254: KEY4.1 48.377,3.098 47.804,3.671 47.754,3.671 46.863,4.562 46.863,18.415 48.895,20.447 56.239,20.447 56.388,20.596 56.388,22.094 56.177,22.305 56.177,23.415 56.388,23.626 56.388,24.794 57.884,26.289 58.928,26.289 59.329,25.888 U2.33
LED1: R11.1 U2.40 | length 5.4
  Top Layer w0.254: R11.1@51.138,18.045 53.964,18.045 54.503,17.506 U2.40
NetB1_1: B1.1 C5.2 ds1.14 | length 29.5
  Top Layer w0.254: C5.2 73.574,15.178 ds1.14 76.327,15.748 80.01,12.065 84.201,12.065 89.248,7.018 B1.1
NetH1_0: H1.0 H5.16 | length 17.2
  Bottom Layer w0.254: H1.0 38.016,43.223 42.291,47.498 H5.16
NetH1_1: H1.1 H5.15 | length 27
  Top Layer w0.254: H1.1 v1(35.722,43.215)
  Bottom Layer w0.254: v1(35.722,43.215) 36.957,44.45 38.481,44.45 41.148,47.117 41.91,47.879 41.91,56.007 H5.15
NetH1_2: H1.2 H5.8 | length 28.3
  Bottom Layer w0.254: H5.8 22.352,63.627 22.352,44.831 26.543,40.64 H1.2
NetH1_3: H1.3 H5.9 | length 22.3
  Bottom Layer w0.254: H5.9 24.511,44.958 28.321,41.148 28.321,38.735 27.494,37.908 H1.3
NetH1_4: H1.4 H5.13 | length 28.1
  Top Layer w0.254: H1.4 31.452,35.643 33.147,37.338 v1(33.147,42.545)
  Bottom Layer w0.254: v1(33.147,42.545) 33.147,42.799 33.909,43.561 33.909,46.228 33.909,46.355 36.83,49.276 36.83,55.753 36.83,56.007 H5.13
NetH1_5: H1.5 H5.14 | length 26.2
  Top Layer w0.254: H1.5 31.395,34.824 33.655,37.084 33.655,41.91 v1(34.29,42.545)
  Bottom Layer w0.254: v1(34.29,42.545) 34.29,46.101 37.211,49.022 H5.14
NetH1_6: H1.6 H5.11 | length 27.4
  Top Layer w0.254: v1(27.559,55.88) 27.559,56.134 H5.11
  Bottom Layer w0.254: v1(27.559,55.88) 28.575,54.864 28.575,44.45 34.148,38.877 H1.6
NetH1_11: H1.11 R8.1 | length 7.3
  Top Layer w0.508: R8.1 32.013,49.775 32.767,49.022 H1.11
NetH2_0: H2.0 H6.16 | length 17.2
  Bottom Layer w0.254: H2.0 63.543,43.223 67.818,47.498 H6.16
NetH2_1: H2.1 H6.15 | length 27
  Top Layer w0.254: H2.1 v1@60.926,43.215
  Bottom Layer w0.254: v1@60.926,43.215 61.376,43.215 62.611,44.45 64.135,44.45 67.437,47.752 67.437,55.88 65.278,58.039 H6.15
  other v1: 61.087,43.18
NetH2_2: H2.2 H6.8 | length 27.8
  Bottom Layer w0.254: H6.8 48.133,63.881 48.133,57.658 49.657,56.134 49.657,45.085 52.67,42.072 H2.2
NetH2_3: H2.3 H6.9 | length 22.7
  Bottom Layer w0.254: H6.9 50.038,45.339 54.356,41.021 54.356,39.116 53.148,37.908 H2.3
NetH2_4: H2.4 H6.13 | length 37.4
  Top Layer w0.254: H2.4 58.122,35.643 59.055,36.576 59.055,42.164 v1(58.801,42.418)
  Bottom Layer w0.254: v1(58.801,42.418) 58.801,43.18 59.563,43.942 59.563,45.847 60.452,46.736 65.151,46.736 66.675,48.26 66.675,55.372 65.405,56.642 61.722,56.642 H6.13
NetH2_5: H2.5 H6.14 | length 33.8
  Top Layer w0.254: H2.5 57.479,34.365 59.436,36.322 59.436,40.64 59.944,41.148 v1(59.944,42.418)
  Bottom Layer w0.254: v1(59.944,42.418) 59.944,45.593 60.706,46.355 65.405,46.355 67.056,48.006 67.056,55.626 65.659,57.023 63.881,57.023 H6.14
NetH2_6: H2.6 H6.11 | length 27.3
  Top Layer w0.254: v1(53.213,56.007) 53.213,56.261 H6.11
  Bottom Layer w0.254: v1(53.213,56.007) 53.975,55.245 53.975,44.577 59.76,38.793 H2.6
NetH2_7: H2.7 H6.10 | length 26.5
  Bottom Layer w0.254: H6.10 52.578,57.785 54.356,56.007 54.356,44.831 62.196,36.991 H2.7
NetH2_8: H2.8 H6.1 | length 31.6
  Bottom Layer w0.254: H2.8 64.46,37.917 65.278,38.735 65.278,43.561 68.58,46.863 68.58,55.626 69.85,56.896 69.85,61.329 67.818,63.361 H6.1
NetH2_9: H2.9 H6.2 | length 29.2
  Bottom Layer w0.254: H2.9 64.272,40.65 64.643,41.021 64.643,43.688 68.199,47.244 68.199,55.88 69.469,57.15 69.469,61.087 65.278,65.278 H6.2
NetH2_11: H2.11 R9.1 | length 7.3
  Top Layer w0.508: R9.1 57.667,50.029 58.379,49.318 H2.11
NetH3_0: H3.0 H7.16 | length 17.6
  Bottom Layer w0.254: H3.0 89.832,43.223 93.472,46.863 H7.16
NetH3_1: H3.1 H7.15 | length 27.8
  Top Layer w0.254: H3.1 v1@85.945,43.215
  Bottom Layer w0.254: v1(86.106,43.053) 86.995,43.053 88.265,44.323 90.297,44.323 93.091,47.117 93.091,56.896 91.821,58.166 H7.15
NetH3_2: H3.2 H7.8 | length 27.6
  Bottom Layer w0.254: H7.8 74.041,64.135 74.041,57.785 75.311,56.515 75.311,45.085 78.282,42.115 H3.2
NetH3_3: H3.3 H7.9 | length 22.6
  Bottom Layer w0.254: H7.9 75.692,45.339 79.564,41.468 79.564,38.348 79.361,38.146 78.853,38.146 H3.3
NetH3_4: H3.4 H7.13 | length 29.2
  Top Layer w0.254: H3.4 80.419,35.881 80.941,35.881 80.952,35.893 83.518,35.893 84.709,37.084 84.709,41.529 v1(83.82,42.418)
  Bottom Layer w0.254: v1(83.82,42.418) 83.82,43.053 85.09,44.323 85.09,45.847 88.011,48.768 88.011,56.007 H7.13
NetH3_5: H3.5 H7.14 | length 26.2
  Top Layer w0.254: H3.5 85.09,36.837 v1(85.09,42.418)
  Bottom Layer w0.254: v1(85.09,42.418) 85.09,43.561 85.598,44.069 85.598,45.72 88.392,48.514 H7.14
NetH3_6: H3.6 H7.11 | length 27.6
  Top Layer w0.254: v1(78.613,56.261) 78.867,56.261 H7.11
  Bottom Layer w0.254: v1(78.613,56.261) 78.613,45.72 85.372,38.962 H3.6
NetH3_7: H3.7 H7.10 | length 26.5
  Bottom Layer w0.254: H7.10 78.232,57.912 79.248,56.896 79.248,45.72 80.313,44.655 80.313,44.625 87.808,37.13 H3.7
NetH3_8: H3.8 H7.1 | length 31.2
  Bottom Layer w0.254: H3.8@89.154,37.973 89.154,38.227 90.805,39.878 90.805,42.926 94.234,46.355 94.234,55.88 95.377,57.023 95.377,62.131 93.472,64.036 H7.1
NetH3_9: H3.9 H7.2 | length 28.9
  Bottom Layer w0.254: H3.9 89.697,42.453 93.853,46.609 93.853,56.134 94.882,57.163 94.882,61.836 H7.2
NetH3_11: H3.11 R7.1 | length 7.5
  Top Layer w0.508: R7.1@83.212,52.712 83.212,50.011 83.99,49.233 H3.11 ; H3.11@83.82,45.72 H3.11@83.969,45.72
NetH4_0: H4.0 H8.16 | length 17.1
  Bottom Layer w0.254: H4.0 114.597,43.223 119.126,47.752 H8.16
NetH4_1: H4.1 H8.15 | length 26.8
  Top Layer w0.254: H4.1 v1@111.599,43.215
  Bottom Layer w0.254: v1(111.76,43.053) 112.649,43.053 114.046,44.45 115.189,44.45 118.745,48.006 118.745,56.007 H8.15
NetH4_2: H4.2 H8.8 | length 27.2
  Bottom Layer w0.254: 100.203,64.626 101.346,65.769 H8.8 ; 100.203,64.643 100.203,57.023 100.965,56.261 100.965,44.45 103.893,41.522 H4.2
NetH4_3: H4.3 H8.9 | length 22
  Bottom Layer w0.254: H8.9 101.346,44.831 104.902,41.275 104.902,39.116 104.227,38.441 H4.3
NetH4_4: H4.4 H8.13 | length 29
  Top Layer w0.254: H4.4 108.16,35.643 110.617,38.1 110.617,41.021 v1(109.474,42.164)
  Bottom Layer w0.254: v1(109.474,42.164) 109.474,42.926 110.617,44.069 110.617,45.72 113.665,48.768 113.665,56.007 H8.13
NetH4_5: H4.5 H8.14 | length 26.2
  Top Layer w0.254: H4.5 108.23,34.951 110.998,37.719 v1(110.998,42.164)
  Bottom Layer w0.254: v1(110.998,42.164) 110.998,45.339 114.046,48.387 H8.14
NetH4_6: H4.6 H8.11 | length 28.6
  Bottom Layer w0.254: H8.11 106.426,58.039 104.267,55.88 104.267,55.245 104.267,45.466 112.395,37.338 112.395,37.084 110.983,35.672 H4.6
NetH4_7: H4.7 H8.10 | length 27
  Top Layer w0.254: H8.10 105.41,56.642 v1(105.41,55.88)
  Bottom Layer w0.254: v1(105.41,55.88) 104.775,55.245 104.775,45.72 113.419,37.076 H4.7
NetH4_8: H4.8 H8.1 | length 31.6
  Bottom Layer w0.254: H4.8 115.768,37.917 116.586,38.735 116.586,43.942 119.888,47.244 119.888,55.88 121.031,57.023 121.031,63.881 H8.1
NetH4_9: H4.9 H8.2 | length 29
  Bottom Layer w0.254: H4.9 115.309,42.157 115.824,42.672 115.824,43.815 119.507,47.498 119.507,56.134 120.65,57.277 120.65,59.944 116.586,64.008 H8.2
NetH4_11: H4.11 R10.1 | length 7.3
  Top Layer w0.508: R10.1 108.848,50.029 109.602,49.276 H4.11
NetLED1_2: LED1.2 R11.2 | length 30.8
  Top Layer w0.254: LED1.2 31.668,4.656 v1(32.221,4.656) ; v1(48.514,17.526) 49.022,18.034 R11.2@49.78,18.034
  Bottom Layer w0.254: v1@32.258,4.572 44.577,4.572 47.879,7.874 47.879,16.51 48.514,17.145 v1(48.514,17.526)
NetLED2_2: LED2.2 R12.2 | length 20.3
  Top Layer w0.254: LED2.2 36.621,3.767 v1(38.063,3.767) ; v1(49.53,12.065) 49.53,13.326 R12.2
  Bottom Layer w0.254: v1@38.1,3.683 38.608,4.191 44.831,4.191 48.26,7.62 48.26,11.049 49.276,12.065 v1(49.53,12.065)
NetR1_2: R1.2 U2.3 | length 9.3
  Top Layer w0.254: R1.2 58.039,10.033 58.829,10.823 U2.3
NetR2_2: R2.2 U2.4 | length 10.4
  Top Layer w0.254: R2.2 51.68,8.119 53.213,9.652 58.293,9.652 59.329,10.688 U2.4
NetR3_1: R3.1 U2.44 | length 5.3
  Top Layer w0.254: R3.1@51.153,15.748 53.975,15.748 54.217,15.506 U2.44
NetR4_2: R4.2 U2.20 | length 7.4
  Top Layer w0.254: U2.20 68.503,17.006 69.023,17.526 69.908,17.526 70.086,17.348 70.971,17.348 71.03,17.408 R4.2
NetR6_1: R6.1 WIFI1.7 | length 41.6
  Top Layer w0.254: R6.1 84.709,10.922 89.027,6.604 95.377,6.604 96.52,5.461 98.171,5.461 99.695,6.985 103.632,6.985 109.982,13.335 109.982,15.367 WIFI1.7
OSC_IN: C8.2 U2.5 X1.1 | length 11.8
  Top Layer w0.254: X1.1@57.023,6.477 55.88,6.477 54.418,7.939 C8.2 54.167,7.939 55.499,9.271 58.547,9.271 59.829,10.553 U2.5
OSC_OUT: C9.2 U2.6 X1.3 | length 6.7
  Top Layer w0.254: U2.6 60.329,10.418 59.266,9.355 X1.3 59.67,7.812 C9.2
RST: C7.1 ds1.4 KEY1.1 R5.1 U2.7 WIFI1.6 | length 74.8
  Top Layer w0.254: U2.7 60.829,10.291 61.595,9.525 62.23,9.525 63.763,7.992 R5.1 ; R5.1@63.977,7.974 C7.1@66.64,7.974 ; C7.1 v1@68.34,7.939 ; ds1.4 85.471,17.018 86.054,16.436 v1(86.64,16.436) ; KEY1.1 86.239,6.985 v1(86.323,7.069) ; v1(85.878,11.356) 85.905,11.356 87.757,13.208 87.757,15.201 v1@86.523,16.436
  Bottom Layer w0.254: v1(68.479,7.8) 72.189,7.8 73.533,9.144 83.566,9.144 v1@85.852,11.43 ; v1(85.878,11.356) 86.323,10.911 v1(86.323,7.069) ; v1@86.614,16.51 87.503,15.621 112.141,15.621 114.173,17.653 WIFI1.6
SPI2_CS: H9.13 H9.14 U2.39 | length 35.7
  Top Layer w0.254: U2.39@56.344,17.991 v1(58.002,17.991) ; v1(64.389,19.939) 64.43,19.899 64.811,19.899 65.024,19.685 69.469,19.685 69.723,19.939 70.739,19.939 70.993,20.193 70.993,21.209 72.898,23.114 73.66,23.114 82.804,23.114 83.312,23.622 H9.13 H9.14
  Bottom Layer w0.254: v1@58.039,17.907 58.039,19.177 58.928,20.066 61.547,20.066 61.674,19.939 v1(64.389,19.939)
SPI2_DC: H9.11 H9.12 U2.25 | length 24.1
  Top Layer w0.254: U2.25 63.652,20.828 65.024,20.828 65.532,20.32 70.104,20.32 70.485,20.701 70.485,21.336 72.644,23.495 73.787,23.495 80.391,23.495 80.772,23.876 H9.11 H9.12
SPI2_RST: H9.9 H9.10 U2.27 | length 23.3
  Top Layer w0.254: U2.27 62.329,21.308 62.738,21.717 62.992,21.717 63.754,21.717 64.135,21.336 65.151,21.336 65.723,20.765 69.914,20.765 70.104,20.955 70.104,21.59 72.39,23.876 73.787,23.876 77.724,23.876 78.232,24.384 H9.9 H9.10 H9.10@78.105,28.448
SPI2_SCLK: H9.5 H9.6 U2.26 | length 32.6
  Top Layer w0.254: v1(61.722,18.796) 62.31,19.384 62.373,19.384 62.718,19.73 62.718,19.776 62.829,19.887 U2.26 ; H9.5 H9.6
  Bottom Layer w0.254: v1(61.722,18.796) 61.706,18.78 61.706,14.24 62.103,13.843 67.056,13.843 67.564,13.335 69.215,13.335 70.485,14.605 70.485,17.371 69.977,17.879 69.977,19.177 70.866,20.066 72.39,20.066 73.152,20.828 H9.5
SPI2_SDIN: H9.7 H9.8 U2.28 | length 20.7
  Top Layer w0.254: U2.28 61.829,21.443 62.484,22.098 62.992,22.098 64.008,22.098 64.389,21.717 65.405,21.717 65.913,21.209 69.342,21.209 69.723,21.59 69.723,21.844 72.136,24.257 73.787,24.257 75.311,24.257 75.692,24.638 H9.7 H9.8
SWCLK: J1.1 U2.37 | length 14.6
  Top Layer w0.254: v1(51.816,19.812) 53.975,19.812 54.781,19.006 U2.37
  Bottom Layer w0.254: J1.1 49.149,26.289 50.292,25.146 50.292,22.606 51.816,21.082 v1(51.816,19.812)
SWDIO: J1.2 U2.34 | length 22
  Top Layer w0.254: J1.2 48.006,29.845 50.927,29.845 52.197,28.575 v1(56.261,28.575) 54.864,28.575 ; v1(58.687,25.133) 58.687,25.037 58.885,24.839 58.885,22.305 58.829,22.249 U2.34
  Bottom Layer w0.254: v1(56.261,28.575) 56.261,27.889 56.134,27.762 56.134,26.67 57.671,25.133 v1(58.687,25.133)
U3_RX: U2.22 WIFI1.8 | length 53.9
  Top Layer w0.254: U2.22 65.448,18.006 65.559,18.117 65.605,18.117 65.833,18.345 65.833,18.667 ; 65.833,18.667 65.833,19.01 66.127,19.304 69.723,19.304 69.977,19.558 70.993,19.558 71.374,19.939 71.374,20.955 73.152,22.733 WIFI1.8 114.808,21.717
U3_TX: U2.21 WIFI1.4 | length 59.7
  Top Layer w0.254: U2.21 68.464,17.506 69.119,18.161 v1(70.739,18.161)
  Bottom Layer w0.254: v1(70.739,18.161) 71.628,18.161 72.771,17.018 72.771,12.595 72.92,12.446 80.518,12.446 86.233,12.446 88.392,14.605 111.633,14.605 112.649,13.589 115.062,13.589 116.586,15.113 WIFI1.4
pads on no net: Designator9.1 Designator10.1 Designator11.1 Designator12.1 ds1.1 ds1.3 H1.L0 H1.R0 H2.L0 H2.R0 H3.L0 H3.R0 H4.L0 H4.R0 U1.2 U2.2 u4.0 USB1.2 USB1.3 USB1.4 USB1.6 USB1.7 USB1.8 USB1.9 WIFI1.2 WIFI1.3 X1.2 X1.4
copper on no net:
  other v1: 60.706,18.161

## Polygon pours and split planes (outlines as drawn)
GND on Top Layer "GND_L01_P002" (solid, remove dead copper, pour order 2): 0,70.866 141.986,70.739 141.986,0.127 141.859,0 -0.254,-0.254
no net on Top Layer "NONET_L01_P001" (none, pour order 1): 0.002,15.748 0.002,23.368 7.368,23.368 7.366,21.59 5.588,21.59 5.588,17.526 7.366,17.526 7.368,15.748
no net on Top Layer "NONET_L01_P000" (none, pour order 0): 0.002,15.748 0.002,23.368 7.368,23.368 7.366,21.59 5.588,21.59 5.588,17.526 7.366,17.526 7.368,15.748
GND on Bottom Layer "GND_L02_P003" (solid, remove dead copper, pour order 3): -0.254,-0.254 0,0 0,70.866 141.859,70.866 141.986,70.739 141.859,70.612 141.859,0

## Keep-outs
Keep-Out Layer:
  the board outline again, w0.1

## Silkscreen, mask and mechanical layers (free items; w line width, h text height)
Top Overlay:
  text "SWD Port" at 40.386,30.226 h1.52
  text "SPI Interface" at 67.056,30.099 h1.52
Bottom Overlay:
  text "Present For Suetlan" at 109.093,17.907 h3
  text "Designed by Cirnoice" at 109.347,12.065 h3
  text "2021/8/18" at 108.966,9.743 h1.52

## Text inside footprints (layer, text, board x,y; h text height)
P1: Top Overlay "GND" at 42.799,16.002 h1.27; Top Overlay "3.3V" at 42.545,25.273 h1.27